# Altium PCB MoonPilot_Logic.PcbDoc
Units mil, origin at the board's own origin, x right, y up, seen from the top; angles counter-clockwise.
Board outline 2362.21 x 3543.31 mil, 4 copper layers (L1, L2, L3, L4), stack 64.6 mil thick; 102 components, 348 nets, 725 pads, 10 vias.
Unrouted connection lines stored in the file: 317.
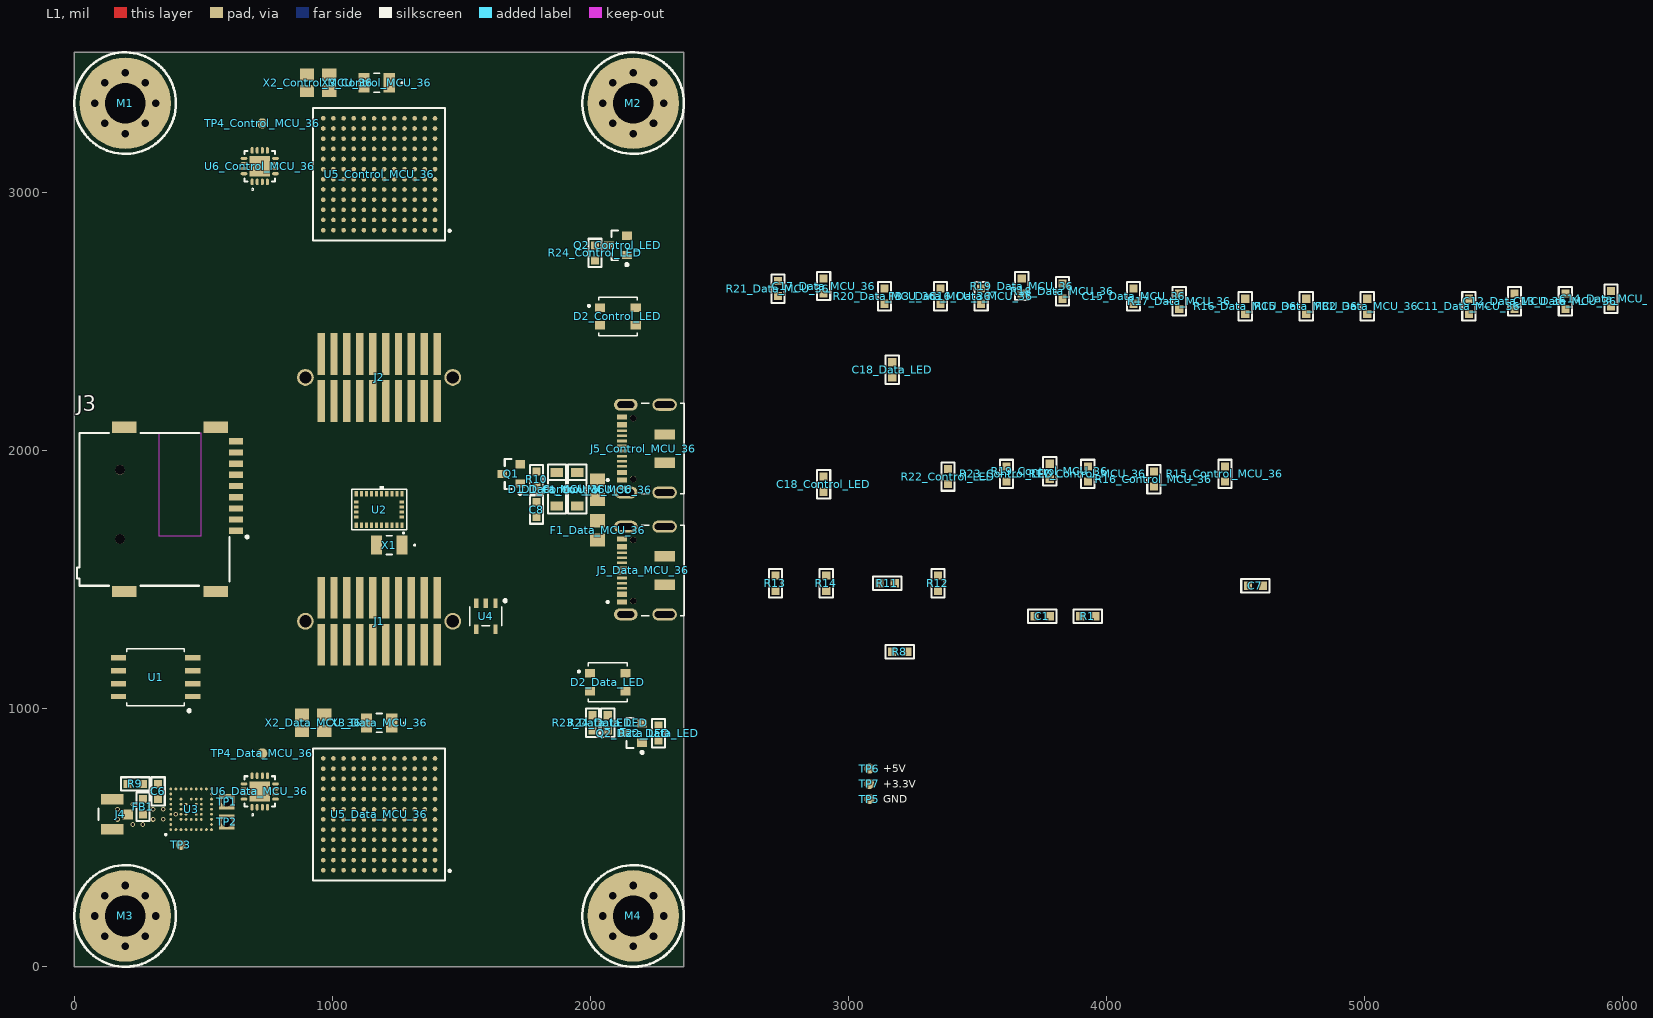
[diagram p0: L1 view]
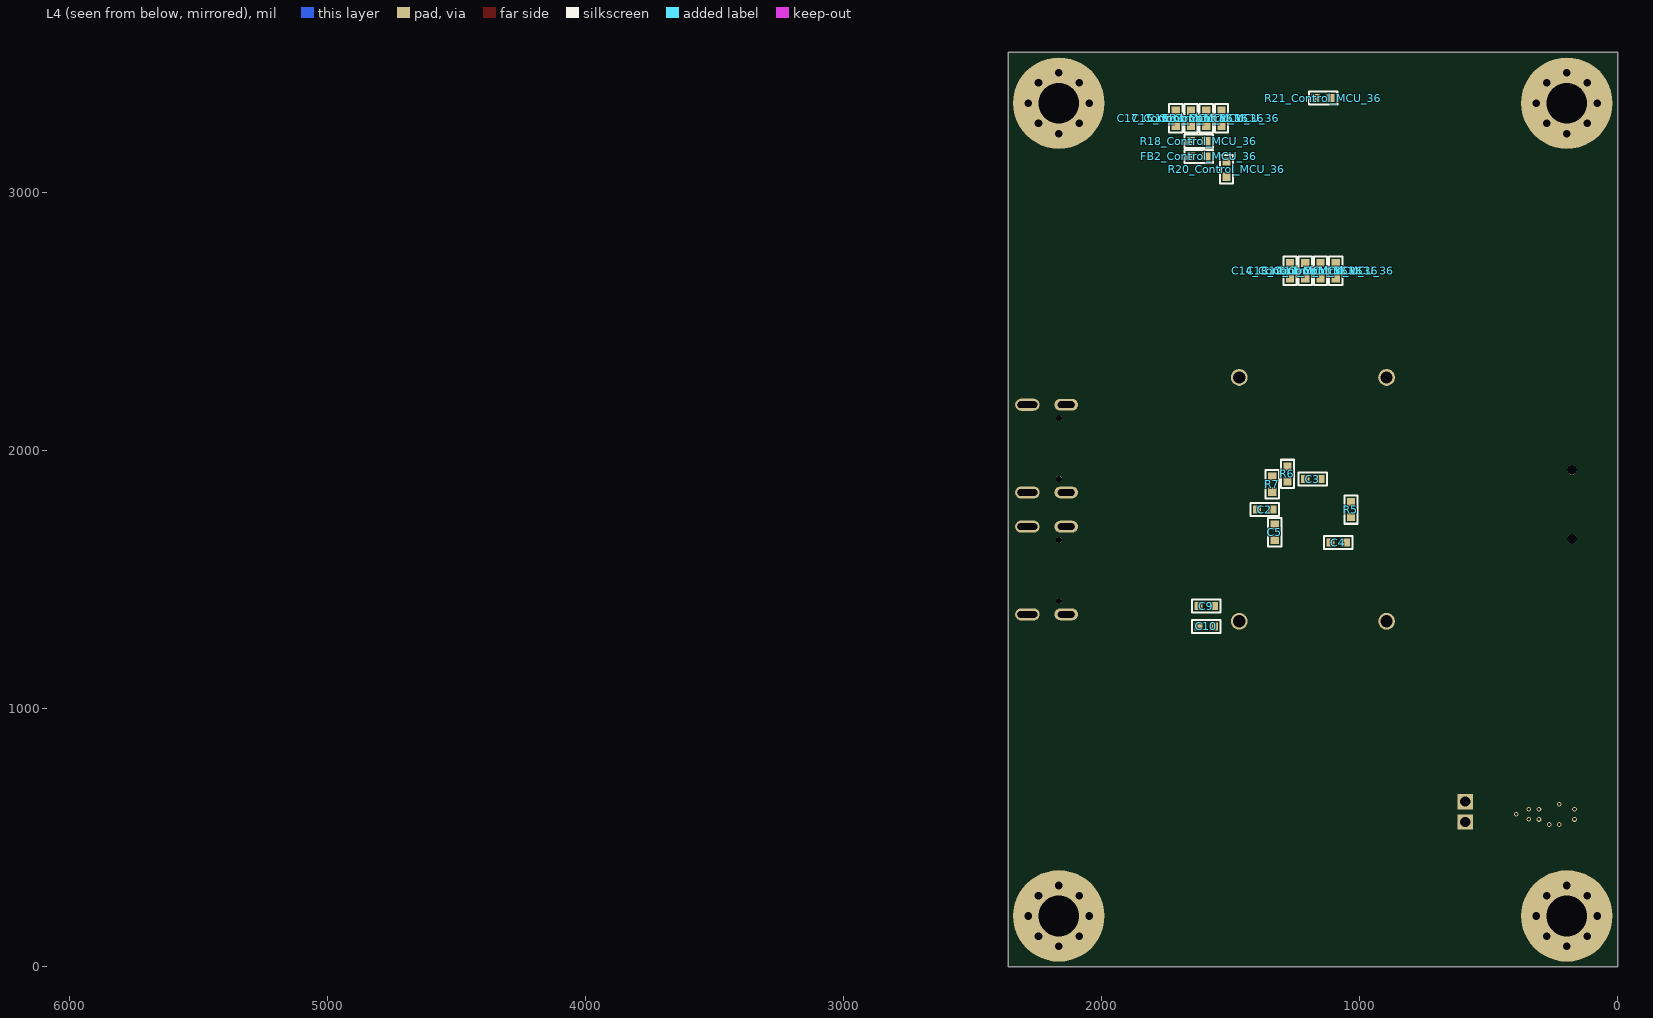
[diagram p1: L4 view, seen from below]
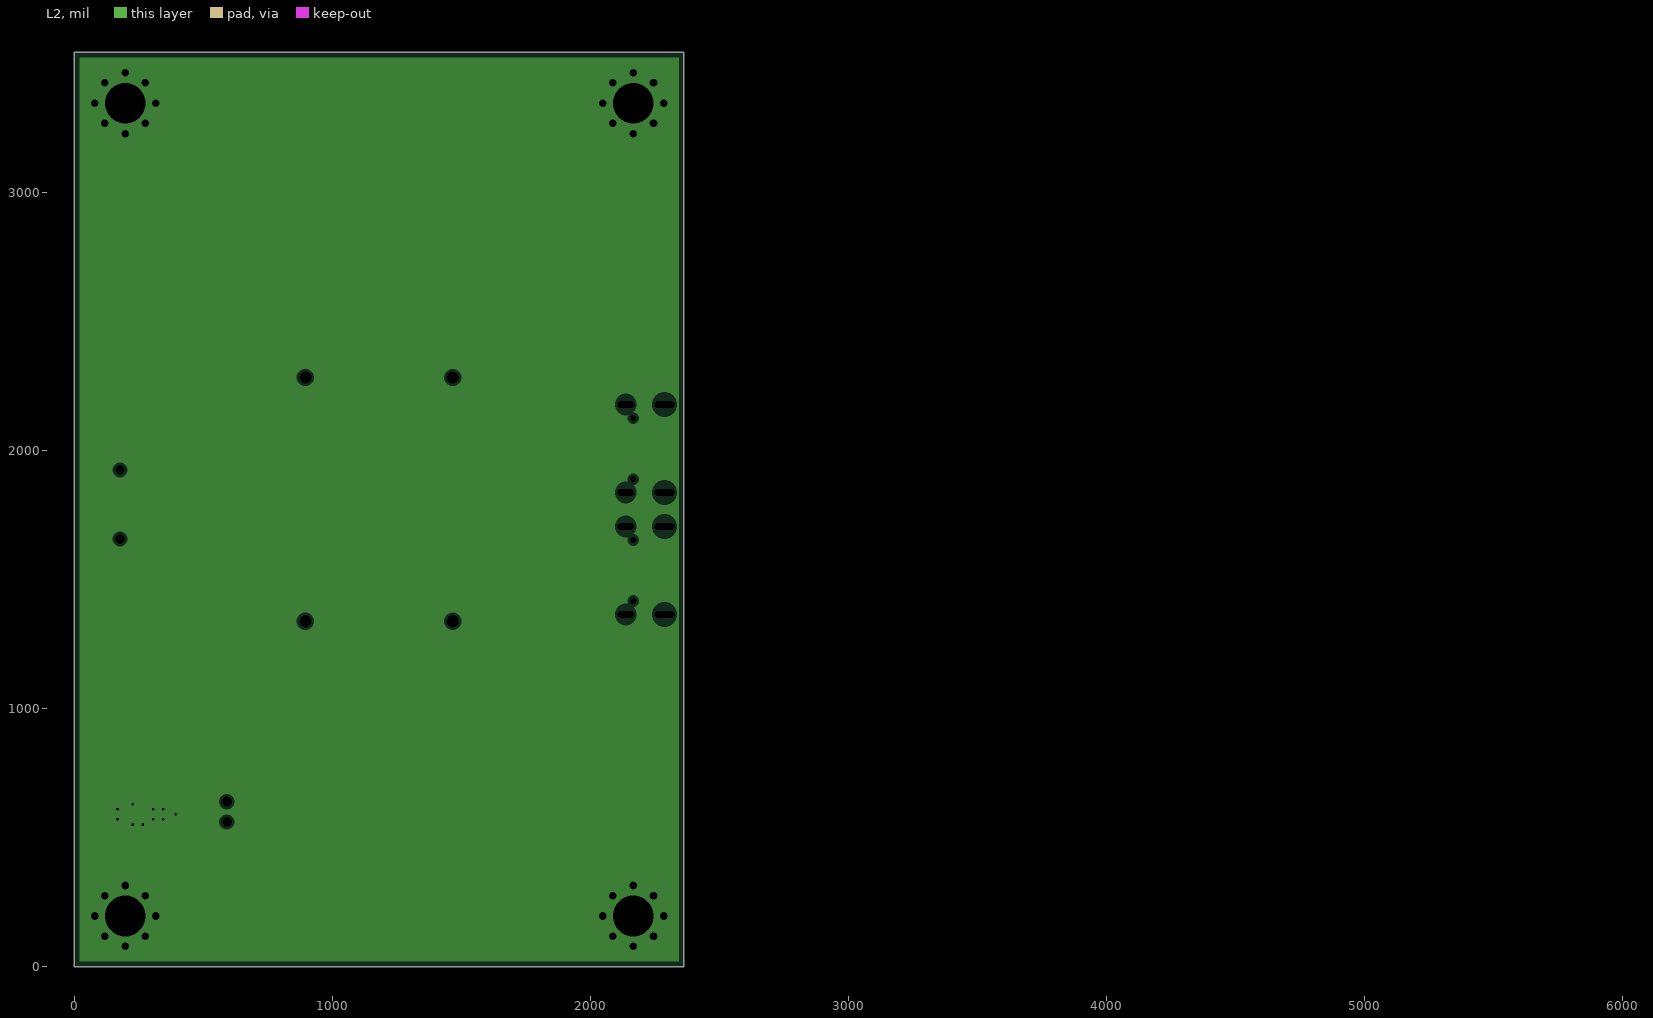
[diagram p2: L2, clearances drawn from the general rule]
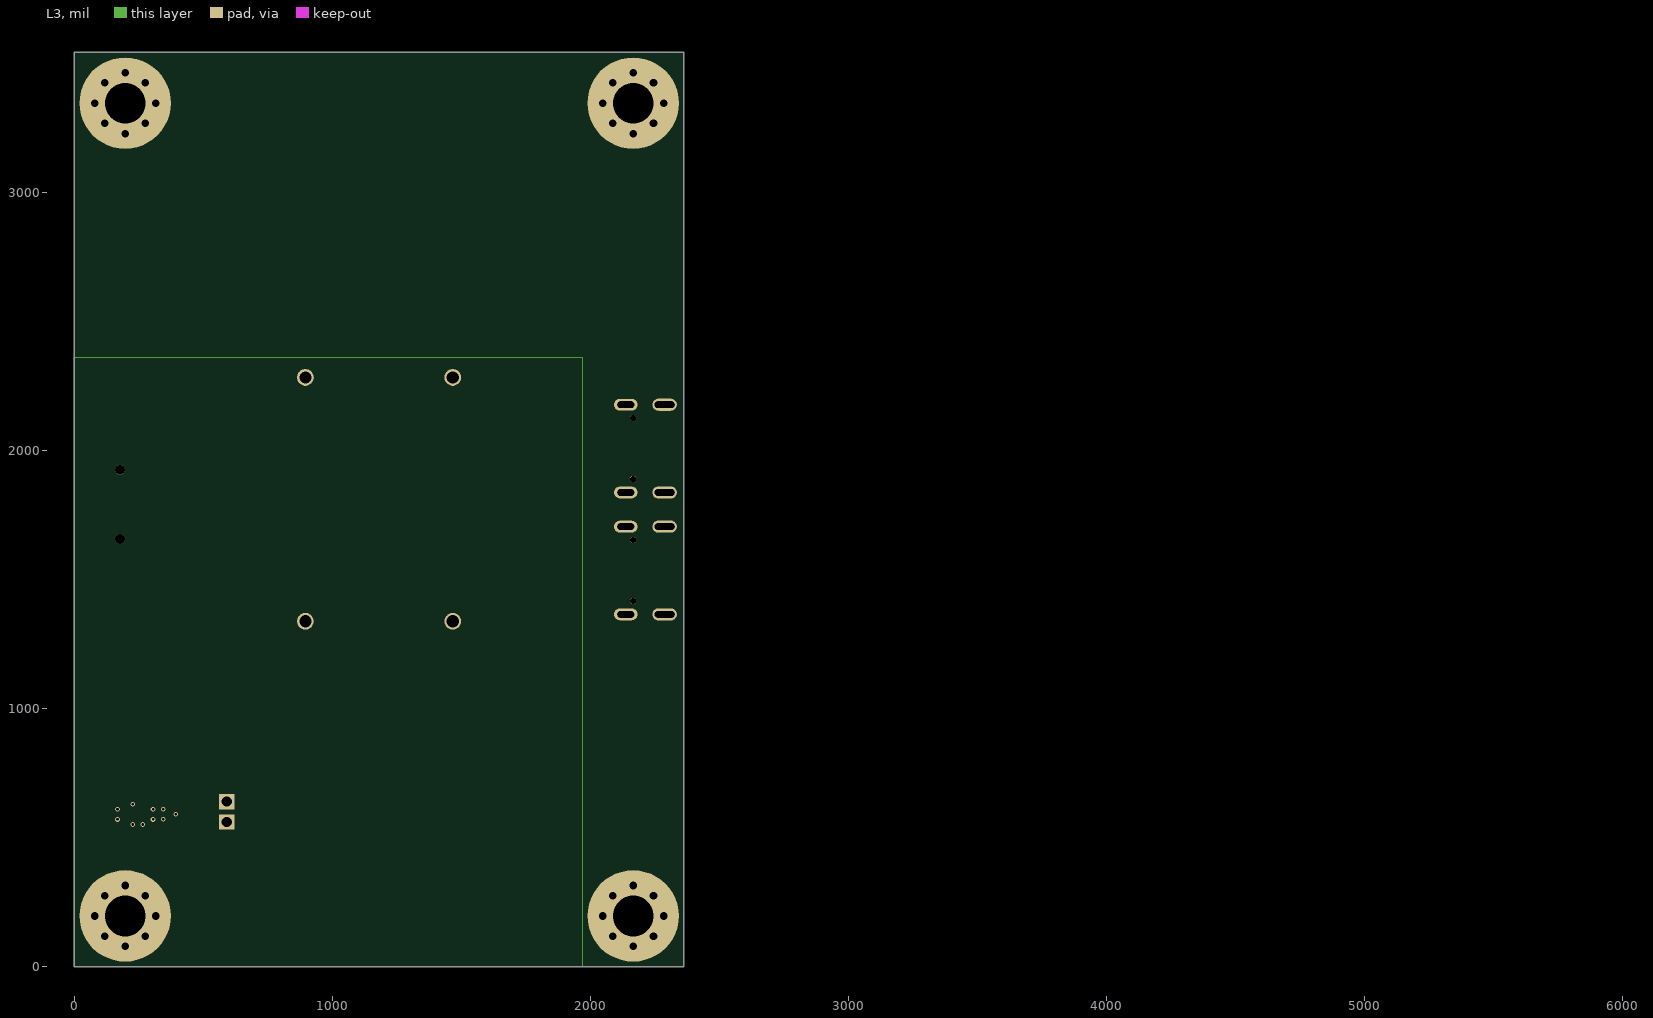
[diagram p3: L3]

## Layer stack, top to bottom
Top Solder: solder mask 0.1, Solder Resist, Dk 1
L1: signal copper 1.4
Prepeg1: dielectric 6.7, FR408, Dk 3.66
L2: plane copper 0.7, net GND
Core: dielectric 47, FR-4, Dk 3.66
L3: signal copper 0.7
Prepeg2: dielectric 6.7, FR408, Dk 3.66
L4: signal copper 1.4
Bottom Solder: solder mask 0.1, Solder Resist, Dk 1

## Board outline
0,0 2362.2,0 2362.2,3543.31 0,3543.31

## Design rules (kind name [scope] priority, off if disabled: settings)
BoardOutlineClearance [All] p1: gap=15 ignorepadtopadclearanceinfootprint=FALSE
Clearance "Clearance Polygons" [InPolygon] p1: gap=10 ignorepadtopadclearanceinfootprint=FALSE except(0: Arc-Hole Track-Hole SMDPad-Hole THPad-Hole Via-Hole Fill-Hole Poly-Hole Region-Hole Text-Hole)
Clearance [All] p2: gap=5 ignorepadtopadclearanceinfootprint=FALSE except(0: Arc-Hole Track-Hole SMDPad-Hole THPad-Hole Via-Hole Fill-Hole Poly-Hole Region-Hole Text-Hole)
ComponentClearance "HM-TRP & UFL" [InComponent('X1') vs InComponent('U1')] p1: gap=0 collisioncheckmode=3 verticalgap=0 showdistances=FALSE
ComponentClearance [All] p2: gap=1 collisioncheckmode=3 verticalgap=1 showdistances=FALSE
DiffPairsRouting [All] p1: maxlimit=393.7 minlimit=5 mostfreqgap=8 toplayer_minwidth=5 toplayer_maxwidth=15 toplayer_prefwidth=8 midlayer2_minwidth=5 midlayer2_maxwidth=15 midlayer2_prefwidth=8 bottomlayer_minwidth=5 bottomlayer_maxwidth=15 bottomlayer_prefwidth=8 maxuncoupledlength=500
HoleSize [All] p1: absolutevalues=TRUE maxlimit=265 minlimit=10 maxpercent=80.000 minpercent=20.000
HoleToHoleClearance [All] p1: gap=10 allowstackedmicrovias=FALSE
MinimumAnnularRing [All] p1: minimumring=4
MinimumSolderMaskSliver [All] p1: minsoldermaskwidth=0
PlaneClearance [All] p1: clearance=10
PlaneConnect [All] p1: planeconnectstyle=Relief reliefexpansion=4 reliefentries=4 reliefconductorwidth=6 reliefairgap=6
PolygonConnect "Via connect style" [isVia] p1: connectstyle=Direct reliefconductorwidth=10 reliefentries=4 polygonreliefangle="90 Angle" airgapwidth=10
PolygonConnect [All] p2: connectstyle=Relief reliefconductorwidth=10 reliefentries=4 polygonreliefangle="90 Angle" airgapwidth=6
RoutingCorners [All] p1: cornerstyle=45-Degree minsetback=49.21 maxsetback=49.21
RoutingVias [All] p1: holewidth=12 width=22 viastyle="Through Hole" minholewidth=10 minwidth=18 maxholewidth=100 maxwidth=114
SilkToSilkClearance [All] p1: silktosilkclearance=0
SilkToSolderMaskClearance [IsPad] p1: minsilkscreentomaskgap=5 clearancetoexposedcopper=TRUE
SolderMaskExpansion [All] p1: expansion=2.5 istentingtop=FALSE
Width +3.3V [InNet('+3.3V')] p1: maxlimit=400 minlimit=5 preferedwidth=15 minimp=50.000000 maximp=50.000000 favimp=50.000000
Width GND [InNet('GND')] p2: maxlimit=30 minlimit=5 preferedwidth=15 minimp=50.000000 maximp=50.000000 favimp=50.000000
Width Power [InNetClass('Power')] p3: maxlimit=40 minlimit=5 preferedwidth=15 minimp=50.000000 maximp=50.000000 favimp=50.000000
Width 3V3 [InNetClass('3V3')] p4: maxlimit=30 minlimit=5 preferedwidth=15 minimp=50.000000 maximp=50.000000 favimp=50.000000
Width [All] p5: maxlimit=400 minlimit=5 preferedwidth=8 minimp=50.000000 maximp=50.000000 favimp=50.000000
20 further rules are at their usual default settings.

## Classes and differential pairs
channel class RGB_LED: Control_LED Data_LED
channel class MCU_3.6: Control_MCU_36 Data_MCU_36
component class Main: C1 C2 C3 C4 C5 C6 C7 C8 C9 C10 C17 C18 C19 FB1 J1 J2 J3 J4 M1 M2 M3 M4 Q1 R1 R5 R6 R7 R8 R9 R10 R11 R12 R13 R14 R19 R21 R22 R23 TP1 TP2 TP3 TP5 TP6 TP7 U1 U2 U3 U4 U7 X1
component class Data_MCU_36: C6_Data_MCU_36 C11_Data_MCU_36 C12_Data_MCU_36 C13_Data_MCU_36 C14_Data_MCU_36 C15_Data_MCU_36 C16_Data_MCU_36 C17_Data_MCU_36 C20_Data_MCU_36 C21_Data_MCU_36 C22_Data_MCU_36 C23_Data_MCU_36 C24_Data_MCU_36 C25_Data_MCU_36 D1_Data_MCU_36 D3_Data_MCU_36 F1_Data_MCU_36 F2_Data_MCU_36 FB2_Data_MCU_36 FB3_Data_MCU_36 J5_Data_MCU_36 J6_Data_MCU_36 R15_Data_MCU_36 R16_Data_MCU_36 R17_Data_MCU_36 R18_Data_MCU_36 R19_Data_MCU_36 R20_Data_MCU_36 R21_Data_MCU_36 R24_Data_MCU_36 R25_Data_MCU_36 R26_Data_MCU_36 R27_Data_MCU_36 R28_Data_MCU_36 R29_Data_MCU_36 TP4_Data_MCU_36 TP5_Data_MCU_36 U3_Data_MCU_36 U5_Data_MCU_36 U6_Data_MCU_36 U8_Data_MCU_36 X2_Data_MCU_36 X3_Data_MCU_36 X4_Data_MCU_36
component class Data_LED: C18_Data_LED C26_Data_LED D2_Data_LED D4_Data_LED Q2_Data_LED Q3_Data_LED R22_Data_LED R23_Data_LED R24_Data_LED R30_Data_LED R31_Data_LED R32_Data_LED
component class Control_MCU_36: C6_Control_MCU_36 C11_Control_MCU_36 C12_Control_MCU_36 C13_Control_MCU_36 C14_Control_MCU_36 C15_Control_MCU_36 C16_Control_MCU_36 C17_Control_MCU_36 C20_Control_MCU_36 C21_Control_MCU_36 C22_Control_MCU_36 C23_Control_MCU_36 C24_Control_MCU_36 C25_Control_MCU_36 D1_Control_MCU_36 D3_Control_MCU_36 F1_Control_MCU_36 F2_Control_MCU_36 FB2_Control_MCU_36 FB3_Control_MCU_36 J5_Control_MCU_36 J6_Control_MCU_36 R15_Control_MCU_36 R16_Control_MCU_36 R17_Control_MCU_36 R18_Control_MCU_36 R19_Control_MCU_36 R20_Control_MCU_36 R21_Control_MCU_36 R24_Control_MCU_36 R25_Control_MCU_36 R26_Control_MCU_36 R27_Control_MCU_36 R28_Control_MCU_36 R29_Control_MCU_36 TP4_Control_MCU_36 TP5_Control_MCU_36 U3_Control_MCU_36 U5_Control_MCU_36 U6_Control_MCU_36 U8_Control_MCU_36 X2_Control_MCU_36 X3_Control_MCU_36 X4_Control_MCU_36
component class Control_LED: C18_Control_LED C26_Control_LED D2_Control_LED D4_Control_LED Q2_Control_LED Q3_Control_LED R22_Control_LED R23_Control_LED R24_Control_LED R30_Control_LED R31_Control_LED R32_Control_LED

## Components (designator, comment, footprint, x,y, rotation, side; value= is the part's Value field where it differs from the comment)
C1 "100nF" 0603_CAP 3750.01,1358.27 r0 top
C2 "100nF" 0603_CAP 1368.11,1771.65 r0 bottom
C3 "100nF" 0603_CAP 1181.1,1889.76 r180 bottom
C4 "12pF" 0603_CAP 1082.68,1643.7 r180 bottom
C5 "12pF" 0603_CAP 1328.74,1683.07 r270 bottom
C6 "40pF" 0603_CAP 324.8,679.13 r90 top
C7 "100nF" 0603_CAP 4576.77,1476.38 r0 top
C8 "1µF" 0603_CAP 1791.34,1771.65 r270 top
C9 "1µF" 0603_CAP 1594.49,1397.64 r180 bottom
C10 "2.2µF" 0603_CAP 1594.49,1318.9 r180 bottom
C11_Control_MCU_36 "2.2µF" 0603_CAP 1092.53,2696.85 r270 bottom (schematic designator C11)
C11_Data_MCU_36 "2.2µF" 0603_CAP 5403.55,2559.06 r90 top (schematic designator C11)
C12_Control_MCU_36 "100nF" 0603_CAP 1151.59,2696.85 r270 bottom (schematic designator C12)
C12_Data_MCU_36 "100nF" 0603_CAP 5580.72,2578.74 r90 top (schematic designator C12)
C13_Control_MCU_36 "100nF" 0603_CAP 1210.64,2696.85 r270 bottom (schematic designator C13)
C13_Data_MCU_36 "100nF" 0603_CAP 5777.57,2578.74 r90 top (schematic designator C13)
C14_Control_MCU_36 "10nF" 0603_CAP 1269.69,2696.85 r270 bottom (schematic designator C14)
C14_Data_MCU_36 "10nF" 0603_CAP 5954.72,2588.58 r90 top (schematic designator C14)
C15_Control_MCU_36 "2.2µF" 0603_CAP 1653.54,3287.4 r90 bottom (schematic designator C15)
C15_Data_MCU_36 "2.2µF" 0603_CAP 4104.34,2598.43 r90 top (schematic designator C15)
C16_Control_MCU_36 "100nF" 0603_CAP 1594.49,3287.4 r90 bottom (schematic designator C16)
C16_Data_MCU_36 "100nF" 0603_CAP 3513.79,2598.43 r90 top (schematic designator C16)
C17_Control_MCU_36 "100nF" 0603_CAP 1712.6,3287.4 r270 bottom (schematic designator C17)
C17_Data_MCU_36 "100nF" 0603_CAP 2903.55,2637.8 r90 top (schematic designator C17)
C18_Control_LED "1µF" 0603_CAP 2903.54,1870.08 r90 top (schematic designator C18)
C18_Data_LED "1µF" 0603_CAP 3169.29,2312.99 r90 top (schematic designator C18)
D1_Control_MCU_36 "PMEG3020EH,115" SOD-123 1948.82,1850.39 r90 top (schematic designator D1)
D1_Data_MCU_36 "PMEG3020EH,115" SOD-123 1870.08,1850.39 r90 top (schematic designator D1)
D2_Control_LED "Neopixel" 2659 2106.3,2519.68 r0 top (schematic designator D2)
D2_Data_LED "Neopixel" 2659 2066.93,1102.36 r0 top (schematic designator D2)
F1_Control_MCU_36 "Polyfuse" 0805 2027.56,1848.43 r270 top (schematic designator F1)
F1_Data_MCU_36 "Polyfuse" 0805 2027.56,1690.94 r90 top (schematic designator F1)
FB1 "FBTH1608HL221-T" 0603_FERRITE 265.75,620.08 r90 top
FB2_Control_MCU_36 "FBTH1608HL221-T" 0603_FERRITE 1624.02,3139.76 r180 bottom (schematic designator FB2)
FB2_Data_MCU_36 "FBTH1608HL221-T" 0603_FERRITE 5009.85,2559.06 r90 top (schematic designator FB2)
FB3_Control_MCU_36 "FBTH1608HL221-T" 0603_FERRITE 1535.43,3287.4 r90 bottom (schematic designator FB3)
FB3_Data_MCU_36 "FBTH1608HL221-T" 0603_FERRITE 3356.3,2598.43 r90 top (schematic designator FB3)
J1 "5-104655-3" 5-104655-3 1181.1,1338.58 r0 top
J2 "5-104655-3" 5-104655-3 1181.1,2283.46 r0 top
J3 "MEM2075-00-140-01-A_revA" MEM2075-00-140-01-A_revA 295.28,1791.34 r270 top
J4 "U.FL-R-SMT-1(10)" U.FL-R-SMT-1(10) 147.64,590.55 r270 top
J5_Control_MCU_36 "DX07S016JA1R1500" JAE_DX07S016JA1R1500 2165.35,2007.87 r90 top (schematic designator J5)
J5_Data_MCU_36 "DX07S016JA1R1500" JAE_DX07S016JA1R1500 2165.35,1535.43 r90 top (schematic designator J5)
M1 "M4 Hole" M4_SCREW 196.85,3346.46 r0 top
M2 "M4 Hole" M4_SCREW 2165.35,3346.46 r0 top
M3 "M4 Hole" M4_SCREW 196.85,196.85 r0 top
M4 "M4 Hole" M4_SCREW 2165.35,196.85 r0 top
Q1 "BCW66GLT1G" INTR-SOT-23-3_V 1692.91,1909.45 r90 top
Q2_Control_LED "BSS138" INTR-SOT-23-3_V 2106.3,2795.28 r90 top (schematic designator Q2)
Q2_Data_LED "BSS138" INTR-SOT-23-3_V 2165.35,905.51 r90 top (schematic designator Q2)
R1 "10K" 0603_RES 3927.17,1358.27 r0 top
R5 "10K" 0603_RES 1033.46,1771.65 r270 bottom
R6 "10K" 0603_RES 1279.53,1909.45 r90 bottom
R7 "10K" 0603_RES 1338.58,1870.08 r270 bottom
R8 "10K" 0603_RES 3198.82,1220.47 r0 top
R9 "10R" 0603_RES 236.22,708.66 r0 top
R10 "1K" 0603_RES 1791.34,1889.76 r270 top
R11 "2K2" 0603_RES 3149.61,1486.22 r0 top
R12 "2K2" 0603_RES 3346.46,1486.22 r90 top
R13 "2K2" 0603_RES 2716.54,1486.22 r90 top
R14 "2K2" 0603_RES 2913.39,1486.22 r90 top
R15_Control_MCU_36 "33R" 0603_RES 4458.67,1909.45 r90 top (schematic designator R15)
R15_Data_MCU_36 "33R" 0603_RES 4773.63,2559.06 r90 top (schematic designator R15)
R16_Control_MCU_36 "5K1" 0603_RES 4183.08,1889.77 r90 top (schematic designator R16)
R16_Data_MCU_36 "5K1" 0603_RES 4537.41,2559.06 r90 top (schematic designator R16)
R17_Control_MCU_36 "33R" 0603_RES 3927.17,1909.45 r90 top (schematic designator R17)
R17_Data_MCU_36 "33R" 0603_RES 4281.5,2578.74 r90 top (schematic designator R17)
R18_Control_MCU_36 "470R" 0603_RES 1624.02,3198.82 r180 bottom (schematic designator R18)
R18_Data_MCU_36 "470R" 0603_RES 3828.75,2618.11 r90 top (schematic designator R18)
R19_Control_MCU_36 "5K1" 0603_RES 3779.53,1919.29 r90 top (schematic designator R19)
R19_Data_MCU_36 "5K1" 0603_RES 3671.27,2637.8 r90 top (schematic designator R19)
R20_Control_MCU_36 "10K" 0603_RES 1515.75,3090.55 r270 bottom (schematic designator R20)
R20_Data_MCU_36 "10K" 0603_RES 3139.77,2598.43 r90 top (schematic designator R20)
R21_Control_MCU_36 "10K" 0603_RES 1141.73,3366.14 r0 bottom (schematic designator R21)
R21_Data_MCU_36 "10K" 0603_RES 2726.38,2627.96 r90 top (schematic designator R21)
R22_Control_LED "10K" 0603_RES 3385.83,1899.61 r90 top (schematic designator R22)
R22_Data_LED "10K" 0603_RES 2263.78,905.51 r90 top (schematic designator R22)
R23_Control_LED "10K" 0603_RES 3612.2,1909.45 r90 top (schematic designator R23)
R23_Data_LED "10K" 0603_RES 2007.87,944.88 r270 top (schematic designator R23)
R24_Control_LED "470R" 0603_RES 2017.72,2765.75 r270 top (schematic designator R24)
R24_Data_LED "470R" 0603_RES 2066.93,944.88 r90 top (schematic designator R24)
TP1 "GPS_TX" Testpoint 590.55,639.76 r180 top
TP2 "GPS_RX" Testpoint 590.55,561.02 r270 top
TP3 "GPS_SAFEBOOT" Testpoint2 413.39,472.44 r270 top
TP4_Control_MCU_36 "PROG" Testpoint2 728.35,3267.72 r270 top (schematic designator TP4)
TP4_Data_MCU_36 "PROG" Testpoint2 728.35,826.77 r270 top (schematic designator TP4)
TP5 "GND" Testpoint2 3080.71,649.61 r90 top
TP6 "5V" Testpoint2 3080.71,767.72 r90 top
TP7 "3.3V" Testpoint2 3080.71,708.66 r90 top
U1 "W25Q128JVSIQ TR" SOIC_208MIL_WIN 314.96,1122.05 r180 top
U2 "BNO055" QFN_BNO055_BOS 1181.1,1771.65 r180 top
U3 "ZOE-M8Q" ZOE-M8Q 452.76,610.24 r90 top
U4 "3.3V linear regulator 700mA" SOT-25_TOR 1594.49,1358.27 r270 top
U5_Control_MCU_36 "MK66FX1M0VMD18" BGA144C100P12X12_1300X1300X170 1181.1,3070.87 r180 top (schematic designator U5)
U5_Data_MCU_36 "MK66FX1M0VMD18" BGA144C100P12X12_1300X1300X170 1181.1,590.55 r180 top (schematic designator U5)
U6_Control_MCU_36 "IC_MKL02Z32_QFN16" QFN50P300X300X65-17N 718.5,3102.36 r90 top (schematic designator U6)
U6_Data_MCU_36 "IC_MKL02Z32_QFN16" QFN50P300X300X65-17N 718.5,679.13 r90 top (schematic designator U6)
X1 "ABS07-166-32.768KHZ-T" XTAL_ABS07-166 1220.47,1633.86 r180 top
X2_Control_MCU_36 "NX3225SA-16.000000MHZ-B3" XTAL_NX3225SA 944.88,3425.2 r180 top (schematic designator X2)
X2_Data_MCU_36 "NX3225SA-16.000000MHZ-B3" XTAL_NX3225SA 925.2,944.88 r180 top (schematic designator X2)
X3_Control_MCU_36 "ABS07-166-32.768KHZ-T" XTAL_ABS07-166 1171.26,3425.2 r180 top (schematic designator X3)
X3_Data_MCU_36 "ABS07-166-32.768KHZ-T" XTAL_ABS07-166 1181.1,944.88 r180 top (schematic designator X3)

## Footprints (in the part's own frame and the unit in brackets; to place one, negate y for a bottom-side part, rotate by r counter-clockwise, add the part's x,y. Pads: shape width x height; smd on the part's side, far side on the other; paste and mask are expansions set on the pad)
5-104655-3 [mm]
  rect 0.73x4.11 smd: 1(-5.715,2.31) 2(-4.445,2.31) 3(-3.175,2.31) 4(-1.905,2.31) 5(-0.635,2.31) 6(0.635,2.31) 7(1.905,2.31) 8(3.175,2.31) 9(4.445,2.31) 10(5.715,2.31) 11(-5.715,-2.31) 12(-4.445,-2.31) 13(-3.175,-2.31) 14(-1.905,-2.31) 15(-0.635,-2.31) 16(0.635,-2.31) 17(1.905,-2.31) 18(3.175,-2.31) 19(4.445,-2.31) 20(5.715,-2.31)
  round 1.65 hole 1.2: 21(-7.255,0) 21(7.255,0)
  body extent -7.9,-3.62 7.9,3.62, height 5.8
0603_CAP [mm] "0603 capacitor"
  rect 0.8x0.8 smd: 1(-0.75,0) 2(0.75,0)
  silkscreen extent -1.4,-0.65 1.4,0.65, body extent -0.8,-0.4 0.8,0.4, height 0.7
0603_FERRITE [mm] "0603 ferrite bead"
  rect 0.8x0.8 smd: 1(-0.75,0) 2(0.75,0)
  silkscreen extent -1.4,-0.65 1.4,0.65, body extent -0.8,-0.4 0.8,0.4, height 0.4
0603_RES [mm] "0603 resistor"
  rect 0.8x0.8 smd: 1(-0.75,0) 2(0.75,0)
  silkscreen extent -1.4,-0.65 1.4,0.65, body extent -0.8,-0.4 0.8,0.4, height 0.4
0805 [mm] "Chip Resistor; Body 2 x 1.2 mm (LxW typ)"
  rect 1.3x1.5 smd: 1(-0.95,0) 2(0.95,0)
  body extent -1,-0.6 1,0.6, height 0.7
2659 [mm]
  rect 1x0.85 smd: 1(-1.75,0.875) 2(-1.75,-0.875) 3(1.75,-0.875) 4(1.75,0.875)
  silkscreen extent -2.95,-1.9 1.9,1.9, body extent -1.85,-1.75 1.85,1.75, height 0.95
BGA144C100P12X12_1300X1300X170 [mm]
  round 0.45 smd: A1(-5.5,5.5) A2(-4.5,5.5) A3(-3.5,5.5) A4(-2.5,5.5) A5(-1.5,5.5) A6(-0.5,5.5) A7(0.5,5.5) A8(1.5,5.5) A9(2.5,5.5) A10(3.5,5.5) A11(4.5,5.5) A12(5.5,5.5) B1(-5.5,4.5) B2(-4.5,4.5) B3(-3.5,4.5) B4(-2.5,4.5) B5(-1.5,4.5) B6(-0.5,4.5) B7(0.5,4.5) B8(1.5,4.5) B9(2.5,4.5) B10(3.5,4.5) B11(4.5,4.5) B12(5.5,4.5) C1(-5.5,3.5) C2(-4.5,3.5) C3(-3.5,3.5) C4(-2.5,3.5) C5(-1.5,3.5) C6(-0.5,3.5) C7(0.5,3.5) C8(1.5,3.5) C9(2.5,3.5) C10(3.5,3.5) C11(4.5,3.5) C12(5.5,3.5) D1(-5.5,2.5) D2(-4.5,2.5) D3(-3.5,2.5) D4(-2.5,2.5) D5(-1.5,2.5) D6(-0.5,2.5) D7(0.5,2.5) D8(1.5,2.5) D9(2.5,2.5) D10(3.5,2.5) D11(4.5,2.5) D12(5.5,2.5) E1(-5.5,1.5) E2(-4.5,1.5) E3(-3.5,1.5) E4(-2.5,1.5) E5(-1.5,1.5) E6(-0.5,1.5) E7(0.5,1.5) E8(1.5,1.5) E9(2.5,1.5) E10(3.5,1.5) E11(4.5,1.5) E12(5.5,1.5) F1(-5.5,0.5) F2(-4.5,0.5) F3(-3.5,0.5) F4(-2.5,0.5) F5(-1.5,0.5) F6(-0.5,0.5) F7(0.5,0.5) F8(1.5,0.5) F9(2.5,0.5) F10(3.5,0.5) F11(4.5,0.5) F12(5.5,0.5) G1(-5.5,-0.5) G2(-4.5,-0.5) G3(-3.5,-0.5) G4(-2.5,-0.5) G5(-1.5,-0.5) G6(-0.5,-0.5) G7(0.5,-0.5) G8(1.5,-0.5) G9(2.5,-0.5) G10(3.5,-0.5) G11(4.5,-0.5) G12(5.5,-0.5) H1(-5.5,-1.5) H2(-4.5,-1.5) H3(-3.5,-1.5) H4(-2.5,-1.5) H5(-1.5,-1.5) H6(-0.5,-1.5) H7(0.5,-1.5) H8(1.5,-1.5) H9(2.5,-1.5) H10(3.5,-1.5) H11(4.5,-1.5) H12(5.5,-1.5) J1(-5.5,-2.5) J2(-4.5,-2.5) J3(-3.5,-2.5) J4(-2.5,-2.5) J5(-1.5,-2.5) J6(-0.5,-2.5) J7(0.5,-2.5) J8(1.5,-2.5) J9(2.5,-2.5) J10(3.5,-2.5) J11(4.5,-2.5) J12(5.5,-2.5) K1(-5.5,-3.5) K2(-4.5,-3.5) K3(-3.5,-3.5) K4(-2.5,-3.5) K5(-1.5,-3.5) K6(-0.5,-3.5) K7(0.5,-3.5) K8(1.5,-3.5) K9(2.5,-3.5) K10(3.5,-3.5) K11(4.5,-3.5) K12(5.5,-3.5) L1(-5.5,-4.5) L2(-4.5,-4.5) L3(-3.5,-4.5) L4(-2.5,-4.5) L5(-1.5,-4.5) L6(-0.5,-4.5) L7(0.5,-4.5) L8(1.5,-4.5) L9(2.5,-4.5) L10(3.5,-4.5) L11(4.5,-4.5) L12(5.5,-4.5) M1(-5.5,-5.5) M2(-4.5,-5.5) M3(-3.5,-5.5) M4(-2.5,-5.5) M5(-1.5,-5.5) M6(-0.5,-5.5) M7(0.5,-5.5) M8(1.5,-5.5) M9(2.5,-5.5) M10(3.5,-5.5) M11(4.5,-5.5) M12(5.5,-5.5)
  silkscreen extent -7.05,-6.5 6.5,6.5, body extent -6.5,-6.5 6.5,6.5, height 1.7
INTR-SOT-23-3_V [mm] "SOT23, 3-Leads, Body 2.92x1.3mm, Pitch 1.9mm"
  rect 0.802x0.972 smd: 1(-0.95,-0.885) 2(0.95,-0.885) 3(0,0.885)
  silkscreen extent -2.03,-1.01 1.46,0.64, body extent -1.46,-0.65 1.46,0.65, height 1.12
JAE_DX07S016JA1R1500 [mm]
  rect 0.52x1 smd: 1(-3.1,1.1) 2(-2.35,1.1) 11(2.35,1.1) 12(3.1,1.1)
  rect 0.27x1 smd: 3(-1.75,1.1) 4(-1.25,1.1) 5(-0.75,1.1) 6(-0.25,1.1) 7(0.25,1.1) 8(0.75,1.1) 9(1.25,1.1) 10(1.75,1.1)
  rect 1x2 smd: S1(-1.4,-3.1) S2(1.4,-3.1)
  oval 1.158x2.316 hole 0.65 slot 1.65 at 90 deg: S3(-4.32,0.725) S4(4.32,0.725)
  oval 1.2x2.4 hole 0.65 slot 1.95 at 90 deg: S5(-4.32,-3.1) S6(4.32,-3.1)
  round 0.63 hole 0.63 unplated: ""(-3,0) ""(3,0)
  round 0.6 hole 0.6 unplated: ""(3,0)
  silkscreen extent -4.47,-5.05 4.47,2.6, body extent -4.47,-5.48 4.47,1.42, height 3.31
M4_SCREW [mm]
  round 2 hole 0.75: 1(-3,0) 1(-2,-2) 1(-2,2) 1(0,-3) 1(0,3) 1(2,-2) 1(2,2) 1(3,0)
  round 9 hole 4: 1(0,0)
  silkscreen extent -5,-5 5,5
MEM2075-00-140-01-A_revA [mm] "Micro SD Memory Card Connector, 1.4mm Profile SMT , Push-Push , with Normally open Switch"
  round 0.95 hole 0.95 unplated: 10(-3.4,-3) 11(3.4,-3)
  rect 0.62x1.4 smd: P1(2.59,8.42) P2(1.49,8.42) P3(0.39,8.42) P4(-0.71,8.42) P5(-1.81,8.42) P6(-2.91,8.42) P7(-4.01,8.42) P8(-5.11,8.42) P9(-6.21,8.42)
  rect 1.1x2.4 smd: SH1(-7.59,6.42) SH2(8.56,6.42) SH3(-7.59,-2.58) SH4(8.56,-2.58)
  L1 keep-out region: -7.05,0.87 -7.05,4.92 3.15,4.92 3.15,0.87
  silkscreen extent -7.05,-7.23 8,9.62, body extent -7.74,-7.23 8.7,8.62, height 1.4
QFN50P300X300X65-17N [mm]
  oval 0.65x0.3 smd: 1(-1.55,0.75) 2(-1.55,0.25) 3(-1.55,-0.25) 4(-1.55,-0.75) 9(1.55,-0.75) 10(1.55,-0.25) 11(1.55,0.25) 12(1.55,0.75)
  oval 0.3x0.65 smd: 5(-0.75,-1.55) 6(-0.25,-1.55) 7(0.25,-1.55) 8(0.75,-1.55) 13(0.75,1.55) 14(0.25,1.55) 15(-0.25,1.55) 16(-0.75,1.55)
  rect 2x2 smd: 17(0,0)
  silkscreen extent -2.4,-1.5 1.5,1.5
QFN_BNO055_BOS [mil]
  rect 12x21 smd paste+0 mask+0: 1(-88.58,60.5) 6(-88.58,-60.5) 7(-68.9,-60.5) 8(-49.21,-60.5) 9(-29.53,-60.5) 10(-9.84,-60.5) 11(9.84,-60.5) 12(29.53,-60.5) 13(49.21,-60.5) 14(68.9,-60.5) 15(88.58,-60.5) 20(88.58,60.5) 21(68.9,60.5) 22(49.21,60.5) 23(29.53,60.5) 24(9.84,60.5) 25(-9.84,60.5) 26(-29.53,60.5) 27(-49.21,60.5) 28(-68.9,60.5)
  rect 17x12 smd: 2(-88,29.53) 3(-88,9.84) 4(-88,-9.84) 5(-88,-29.53) 16(88,-29.53) 17(88,-9.84) 18(88,9.84) 19(88,29.53)
  silkscreen extent -106,-91 106,92, body extent 0,0 10,10, height 10
SOD-123 [mm]
  rect 0.92x1.22 smd: 1(-1.651,0) 2(1.651,0)
  silkscreen extent -2.41,-0.89 2.41,0.89, body extent -1.93,-0.89 1.93,0.81, height 1.42
SOIC_208MIL_WIN [mil]
  rect 59.56x20.97 smd paste+0 mask+0: 1(-143.5,75) 2(-143.5,25) 3(-143.5,-25) 4(-143.5,-75) 5(143.5,-75) 6(143.5,-25) 7(143.5,25) 8(143.5,75)
  silkscreen extent -135,-111 111,135, body extent -159,-106 159,106, height 85
SOT-25_TOR [mil]
  rect 36.28x17 smd paste+0 mask+0: 1(-50.64,37.4) 2(-50.64,0) 3(-50.64,-37.4) 4(50.64,-37.4) 5(50.64,37.4)
  silkscreen extent -65,-62 38,80, body extent -55,-57 55,57, height 51
Testpoint [mm] "Testpoint"
  rect 1.5x1.5 hole 1 paste+0: 1(0,0)
Testpoint2 [mm] "Testpoint2"
  round 1 smd paste-1.5: 1(0,0)
U.FL-R-SMT-1(10) [mm] "Digikey part no. H11891CT-ND"
  rect 1x1.05 smd paste-1000 mask+0: 1(0,1.525)
  rect 1.05x2.2 smd paste-1000 mask+0: 2(-1.475,0) 3(1.475,0)
  silkscreen extent -0.58,-1.38 0.58,-1.38, body extent -1.5,-1.55 1.5,1.55, height 1.45
XTAL_ABS07-166 [mm] "XTAL_ABS07-166-32.768KHZ-T_ABR"
  rect 1.1x1.9 smd paste+0 mask+0: 1(-1.25,0) 2(1.25,0)
  silkscreen extent -2.58,-0.93 0.3,0.93, body extent -1.81,-1.09 1.82,1.09, height 0.89
XTAL_NX3225SA [mm] "NX3225SA-16.000000MHZ-B3"
  rect 1.4x1.2 smd: 1(-1.1,-0.8) 2(1.1,-0.8) 3(1.1,0.8) 4(-1.1,0.8)
  body extent -1.6,-1.25 1.6,1.25, height 0.7
ZOE-M8Q [mm]
  round 0.27 smd mask+0.05: A1(-2,2) A2(-1.5,2) A3(-1,2) A4(-0.5,2) A5(0,2) A6(0.5,2) A7(1,2) A8(1.5,2) A9(2,2) B1(-2,1.5) B9(2,1.5) C1(-2,1) C3(-1,1) C4(-0.5,1) C5(0,1) C6(0.5,1) C7(1,1) C9(2,1) D1(-2,0.5) D3(-1,0.5) D4(-0.5,0.5) D6(0.5,0.5) D9(2,0.5) E1(-2,0) E3(-1,0) E7(1,0) E9(2,0) F1(-2,-0.5) F3(-1,-0.5) F4(-0.5,-0.5) F6(0.5,-0.5) F7(1,-0.5) F9(2,-0.5) G1(-2,-1) G3(-1,-1) G4(-0.5,-1) G5(0,-1) G6(0.5,-1) G7(1,-1) G9(2,-1) H1(-2,-1.5) H9(2,-1.5) J1(-2,-2) J2(-1.5,-2) J3(-1,-2) J4(-0.5,-2) J5(0,-2) J6(0.5,-2) J7(1,-2) J8(1.5,-2) J9(2,-2)
  silkscreen extent -2.54,2.46 -2.46,2.54, body extent -2.25,-2.25 2.25,2.25, height 1

## Part data
C1 C2 C3 C4 C5 C6 C7 C8 C9 C10 C11_Control_MCU_36 C11_Data_MCU_36 C12_Control_MCU_36 C12_Data_MCU_36 C13_Control_MCU_36 C13_Data_MCU_36 C14_Control_MCU_36 C14_Data_MCU_36 C15_Control_MCU_36 C15_Data_MCU_36 C16_Control_MCU_36 C16_Data_MCU_36 C17_Control_MCU_36 C17_Data_MCU_36 C18_Control_LED C18_Data_LED: library part Capacitor
D1_Control_MCU_36 D1_Data_MCU_36: library part "Schottky diode"
D2_Control_LED D2_Data_LED: "Adafruit Neopixel SMD 3535 / Adafruit part no. 2659 / Digikey part no. 1528-1542-ND", Package="TQFP-32 Adafruit Industries", Digi-Key_Part_Number=2183-2659-ND, Digi-Key_Purchase_URL=https://www.digikey.com/product-detail/en/pololu-corporation/2659/2183-2659-ND/10451102?utm_source=snapeda&utm_medium=aggregator&utm_campaign=symbol, MF="Adafruit Industries", MP=2659, SnapEDA_Link=https://www.snapeda.com/parts/2659/Adafruit%20Industries%20LLC/view-part/548522/?ref=snap
F1_Control_MCU_36 F1_Data_MCU_36: library part Fuse
FB1 FB2_Control_MCU_36 FB2_Data_MCU_36 FB3_Control_MCU_36 FB3_Data_MCU_36: library part "Ferrite Bead", "Digikey part no. / 587-FBTH1608HL221-TCT-ND"
J1 J2: library part "20 pin vertical board to board male", "Digikey part no. A31866-ND / 1.27mm male board to board connector, 2 row"
J3: library part "MicroSD Card holder", "Push-Push style MicroSD Card holder / Digikey part no. 2073-MEM2075-00-140-01-ACT-ND", Manufacturer=GCT, Package=GCT_MEM2075-00-140-01-A_revA, PartRev=A, STANDARD="Manufacturer Recommendations"
J4: library part "U.FL SMD", "Digikey part no. H11891CT-ND"
J5_Control_MCU_36 J5_Data_MCU_36: "USB 2.0 Type C Receptacle Dip Type, PCB Top Mount (Digikey part no. 670-DX07S016JA1R1500CT-ND)", Package=None, Availability=Unavailable, DigiKey-Purchase-URL=https://snapeda.com/shop?store=DigiKey&id=4551013, MF="JAE Electronics", MP=DX07S016JA1R1500, Price=None, SnapEDA_Link=https://www.snapeda.com/parts/DX07S016JA1R1500/JAE%20Electronics/view-part/4551013/?ref=snap
Q1: library part "Transistor NPN"
Q2_Control_LED Q2_Data_LED: library part IRLML2502TRPBF, "N-Channel HEXFET(R) Power MOSFET, 20 V VDS, +/- 12 V VGS, 4.2 A, 3-Pin SOT23, RoHS, Tape and Reel", Drain-Source On Resistance-Max=0.045O, Drain-to-Source Voltage [Vdss]=20V, Manufacturer="International Rectifier", Package Description="3-Pin Small Outline Transistor, Body 2.92 x 1.3 mm, Pitch 0.95 mm", Package Reference=SOT-23-3, Rated Power Dissipation=1.25W, Channel Type=N-Channel, Datasheet URL=https://datasheet.ciiva.com/6383/irlml2502pbf-6383216.pdf, Datasheet Version=Apr-14, Manufacturer URL=http://internationalrectifier.com/, Qg Gate Charge=8nC
R1 R5 R6 R7 R8 R9 R10 R11 R12 R13 R14 R15_Control_MCU_36 R15_Data_MCU_36 R16_Control_MCU_36 R16_Data_MCU_36 R17_Control_MCU_36 R17_Data_MCU_36 R18_Control_MCU_36 R18_Data_MCU_36 R19_Control_MCU_36 R19_Data_MCU_36 R20_Control_MCU_36 R20_Data_MCU_36 R21_Control_MCU_36 R21_Data_MCU_36 R22_Control_LED R22_Data_LED R23_Control_LED R23_Data_LED R24_Control_LED R24_Data_LED: library part Resistor
TP1 TP2 TP3 TP4_Control_MCU_36 TP4_Data_MCU_36 TP5 TP6 TP7: library part Testpoint
U1 U2: "No Description Available", Copyright="Copyright (C) 2018 Accelerated Designs. All rights reserved", RefDes=RefDes, Type=DEV
  U1: Built_By=EMA_Cory, Datasheet=https://www.winbond.com/resource-files/w25q128jv%20revf%2003272018%20plus.pdf, Manufacturer_Part_Number="W25Q128JVSIQ TR", SourceLibrary=Winbond_2020-02-06, Vendor=Winbond
  U2: Built_By=EMA_Matt, Datasheet=https://www.bosch-sensortec.com/media/boschsensortec/downloads/datasheets/bst-bno055-ds000.pdf, Manufacturer_Part_Number=BNO055, SourceLibrary=Bosch_2019-11-06, Vendor=Bosch
U3: "u-blox ZOE GNSS module", Manufacturer=u-blox, Part Description="u-blox ZOE-M8Q GNSS module"
U4: library part XC6222B331MR-G, "Digikey part no. 893-1143-1-ND", Built_By=EMA_UL_Team, Copyright="Copyright (C) 2018 Accelerated Designs. All rights reserved", Manufacturer_Part_Number=XC6222B331MR-G, RefDes=RefDes, SourceLibrary=Torex_2016-07-11_1, Type=DEV, Vendor="Torex Semiconductor"
U5_Control_MCU_36 U5_Data_MCU_36: "32-bit ARM Cortex-M4F Microcontroller 180 MHz 144-MAPBGA / DigiKey part no. 568-13335-ND", Package="MAPBGA-144 NXP Semiconductors", Availability=Unavailable, MF="NXP USA", MP=MK66FX1M0VMD18, Price=None, SnapEDA_Link=https://www.snapeda.com/parts/MK66FX1M0VMD18/NXP%20USA%20Inc./view-part/567598/?ref=snap
U6_Control_MCU_36 U6_Data_MCU_36: "Teensy bootloader", Package="QFN-16 NXP Semiconductors", Availability=Unavailable, MF="NXP USA", MP=MKL02Z32VFG4, Price=None, SnapEDA_Link=https://www.snapeda.com/parts/MKL02Z32VFG4/NXP%20USA%20Inc./view-part/492537/?ref=snap
X1 X3_Control_MCU_36 X3_Data_MCU_36: library part "XTAL_32.768 kHz", "Digikey part no. 535-14514-1-ND / Requires 12pF load capacitors"
X2_Control_MCU_36 X2_Data_MCU_36: library part "XTAL_16 MHz", "Digikey part no. 644-1099-1-ND"

## Via types
v1: diameter 18, hole 10, L1 to L4, tented both sides, 10 vias

## Nets (pads, with @x,y where several pads share a name; then routed paths per layer and width w, separated by ;. In a path a pad name is that pad's centre, name@x,y a point inside that pad or via, vN(x,y) a via of type N, cw(c..) or ccw(c..) an arc to the next point about the centre after c; other vN are vias at no path point)
+3.3V: C1.1 C2.1 C7.1 C10.1 C11_Control_MCU_36.1 C11_Data_MCU_36.1 C12_Control_MCU_36.1 C12_Data_MCU_36.1 C13_Control_MCU_36.1 C13_Data_MCU_36.1 C14_Control_MCU_36.1 C14_Data_MCU_36.1 FB2_Control_MCU_36.2 FB2_Data_MCU_36.2 J3.P4 Q2_Control_LED.1 Q2_Data_LED.1 R1.2 R8.1 R9.1 R11.1 R12.1 R13.1 R14.1 R22_Control_LED.1 R22_Data_LED.1 TP7.1 U1.3 U1.7 U1.8 U2.3 U2.4 U2.28 U3.G1 U3.H1 U3.H9 U3.J1 U3.J2 U4.5 U5_Control_MCU_36.E5 U5_Control_MCU_36.E6 U5_Control_MCU_36.E7 U5_Control_MCU_36.E8 U5_Control_MCU_36.F5 U5_Control_MCU_36.F8 U5_Control_MCU_36.L6 U5_Data_MCU_36.E5 U5_Data_MCU_36.E6 U5_Data_MCU_36.E7 U5_Data_MCU_36.E8 U5_Data_MCU_36.F5 U5_Data_MCU_36.F8 U5_Data_MCU_36.L6 U6_Control_MCU_36.1 U6_Data_MCU_36.1
+5V: C9.1 C18_Control_LED.1 C18_Data_LED.1 D2_Control_LED.2 D2_Data_LED.2 J1.1 J1.2 J1.3 J1.4 Q1.2 R23_Control_LED.1 R23_Data_LED.1 TP6.1 U4.1 U4.3
+5V_USB: D1_Control_MCU_36.2 D1_Data_MCU_36.2 Q1.3 R10.1
BACKUP_SENSE: J1.16 U5_Data_MCU_36.L4
BAT_SENSE: J1.5 U5_Data_MCU_36.L3
D+_Control_MCU_36: R17_Control_MCU_36.1 U5_Control_MCU_36.H1
D+_Data_MCU_36: R17_Data_MCU_36.1 U5_Data_MCU_36.H1
D-_Control_MCU_36: R15_Control_MCU_36.1 U5_Control_MCU_36.H2
D-_Data_MCU_36: R15_Data_MCU_36.1 U5_Data_MCU_36.H2
GND: C1.2 C2.2 C3.1 C4.1 C5.1 C6.2 C7.2 C8.2 C9.2 C10.2 C11_Control_MCU_36.2 C11_Data_MCU_36.2 C12_Control_MCU_36.2 C12_Data_MCU_36.2 C13_Control_MCU_36.2 C13_Data_MCU_36.2 C14_Control_MCU_36.2 C14_Data_MCU_36.2 C18_Control_LED.2 C18_Data_LED.2 D2_Control_LED.4 D2_Data_LED.4 FB3_Control_MCU_36.1 FB3_Data_MCU_36.1 J1.11 J1.12 J1.13 J1.14 J1.15 J3.P6 J4.2 J5_Control_MCU_36.1 J5_Control_MCU_36.12 J5_Data_MCU_36.1 J5_Data_MCU_36.12 M1.1 M2.1 M3.1 M4.1 R5.2 R6.2 R7.1 R16_Control_MCU_36.2 R16_Data_MCU_36.2 R19_Control_MCU_36.2 R19_Data_MCU_36.2 R20_Control_MCU_36.1 R20_Data_MCU_36.1 R21_Control_MCU_36.1 R21_Data_MCU_36.1 TP5.1 U1.4 U2.2 U2.18 U2.25 U3.A1 U3.A3 U3.A5 U3.A7 U3.A8 U3.A9 U3.B9 U3.C7 U3.C9 U3.D6 U3.D9 U3.E7 U3.F7 U3.G3 U3.G6 U3.G7 U3.J3 U3.J9 U4.2 U5_Control_MCU_36.F6 U5_Control_MCU_36.F7 U5_Control_MCU_36.G7 U5_Control_MCU_36.G8 U5_Control_MCU_36.H3 U5_Control_MCU_36.H7 U5_Control_MCU_36.H8 U5_Control_MCU_36.K2 U5_Control_MCU_36.M10 U5_Data_MCU_36.F6 U5_Data_MCU_36.F7 U5_Data_MCU_36.G7 U5_Data_MCU_36.G8 U5_Data_MCU_36.H3 U5_Data_MCU_36.H7 U5_Data_MCU_36.H8 U5_Data_MCU_36.K2 U5_Data_MCU_36.M10 U6_Control_MCU_36.2 U6_Control_MCU_36.17 U6_Data_MCU_36.2 U6_Data_MCU_36.17 X2_Control_MCU_36.4
  other v1: 226.38,551.18 265.75,551.18 167.32,570.87 305.12,570.87 344.49,571.55 393.7,590.55 167.32,610.24 305.12,610.24 344.49,610.24 226.38,629.92
GPIO_1: J2.17 U5_Control_MCU_36.K4
GPIO_2: J2.18 U5_Control_MCU_36.M8
GPIO_3: J2.19 U5_Control_MCU_36.L10
GPIO_4: J2.20 U5_Control_MCU_36.L11
HI_CURRENT_1: J1.17 U5_Control_MCU_36.A3
HI_CURRENT_2: J1.18 U5_Control_MCU_36.A2
HI_CURRENT_3: J1.19 U5_Control_MCU_36.B11
HI_CURRENT_4: J1.20 U5_Control_MCU_36.A12
I2C_EXT_SCL: J2.9 U5_Control_MCU_36.C7
I2C_EXT_SDA: J2.10 U5_Control_MCU_36.B7
I2C_MCU_SCL: R14.2 U5_Control_MCU_36.G12 U5_Data_MCU_36.G12
I2C_MCU_SDA: R12.2 U5_Control_MCU_36.G11 U5_Data_MCU_36.G11
I2C_SENS_SCL: J1.7 R11.2 U2.19 U3.B1 U5_Data_MCU_36.C7
I2C_SENS_SDA: J1.8 R13.2 U2.20 U3.A2 U5_Data_MCU_36.B7
NetC3_2: C3.2 U2.9
NetC4_2: C4.2 U2.26 X1.2
NetC5_2: C5.2 U2.27 X1.1
NetC6_1: C6.1 FB1.2 R9.2
NetC8_1: C8.1 Q1.1 R10.2
NetC15_Control_MCU_36_1: C15_Control_MCU_36.1 FB2_Control_MCU_36.1 R18_Control_MCU_36.1 U5_Control_MCU_36.H5
NetC15_Data_MCU_36_1: C15_Data_MCU_36.1 FB2_Data_MCU_36.1 R18_Data_MCU_36.1 U5_Data_MCU_36.H5
NetC16_Control_MCU_36_1: C16_Control_MCU_36.1 R18_Control_MCU_36.2 U5_Control_MCU_36.G5
NetC16_Data_MCU_36_1: C16_Data_MCU_36.1 R18_Data_MCU_36.2 U5_Data_MCU_36.G5
NetC17_Control_MCU_36_2: C17_Control_MCU_36.2 U5_Control_MCU_36.M3
NetC17_Data_MCU_36_2: C17_Data_MCU_36.2 U5_Data_MCU_36.M3
NetD1_Control_MCU_36_1: D1_Control_MCU_36.1 F1_Control_MCU_36.2
NetD1_Data_MCU_36_1: D1_Data_MCU_36.1 F1_Data_MCU_36.2
NetD2_Control_LED_1: D2_Control_LED.1
NetD2_Control_LED_3: D2_Control_LED.3 R24_Control_LED.2
NetD2_Data_LED_1: D2_Data_LED.1
NetD2_Data_LED_3: D2_Data_LED.3 R24_Data_LED.2
NetF1_Control_MCU_36_1: F1_Control_MCU_36.1 J5_Control_MCU_36.2 J5_Control_MCU_36.11
NetF1_Data_MCU_36_1: F1_Data_MCU_36.1 J5_Data_MCU_36.2 J5_Data_MCU_36.11
NetFB1_1: FB1.1 J4.1 U3.A4
NetJ3_P9: J3.P9 R8.2
NetJ3_SH1: J3.SH1
NetJ3_SH2: J3.SH2
NetJ3_SH3: J3.SH3
NetJ3_SH4: J3.SH4
NetJ5_Control_MCU_36_3: J5_Control_MCU_36.3 R16_Control_MCU_36.1
NetJ5_Control_MCU_36_4: J5_Control_MCU_36.4
NetJ5_Control_MCU_36_5: J5_Control_MCU_36.5 J5_Control_MCU_36.8 R15_Control_MCU_36.2
NetJ5_Control_MCU_36_6: J5_Control_MCU_36.6 J5_Control_MCU_36.7 R17_Control_MCU_36.2
NetJ5_Control_MCU_36_9: J5_Control_MCU_36.9 R19_Control_MCU_36.1
NetJ5_Control_MCU_36_10: J5_Control_MCU_36.10
NetJ5_Control_MCU_36_S1: J5_Control_MCU_36.S1
NetJ5_Control_MCU_36_S2: J5_Control_MCU_36.S2
NetJ5_Control_MCU_36_S3: J5_Control_MCU_36.S3
NetJ5_Control_MCU_36_S4: J5_Control_MCU_36.S4
NetJ5_Control_MCU_36_S5: J5_Control_MCU_36.S5
NetJ5_Control_MCU_36_S6: J5_Control_MCU_36.S6
NetJ5_Data_MCU_36_3: J5_Data_MCU_36.3 R16_Data_MCU_36.1
NetJ5_Data_MCU_36_4: J5_Data_MCU_36.4
NetJ5_Data_MCU_36_5: J5_Data_MCU_36.5 J5_Data_MCU_36.8 R15_Data_MCU_36.2
NetJ5_Data_MCU_36_6: J5_Data_MCU_36.6 J5_Data_MCU_36.7 R17_Data_MCU_36.2
NetJ5_Data_MCU_36_9: J5_Data_MCU_36.9 R19_Data_MCU_36.1
NetJ5_Data_MCU_36_10: J5_Data_MCU_36.10
NetJ5_Data_MCU_36_S1: J5_Data_MCU_36.S1
NetJ5_Data_MCU_36_S2: J5_Data_MCU_36.S2
NetJ5_Data_MCU_36_S3: J5_Data_MCU_36.S3
NetJ5_Data_MCU_36_S4: J5_Data_MCU_36.S4
NetJ5_Data_MCU_36_S5: J5_Data_MCU_36.S5
NetJ5_Data_MCU_36_S6: J5_Data_MCU_36.S6
NetQ2_Control_LED_2: Q2_Control_LED.2 R22_Control_LED.2 U5_Control_MCU_36.E11
NetQ2_Control_LED_3: Q2_Control_LED.3 R23_Control_LED.2 R24_Control_LED.1
NetQ2_Data_LED_2: Q2_Data_LED.2 R22_Data_LED.2 U5_Data_MCU_36.E11
NetQ2_Data_LED_3: Q2_Data_LED.3 R23_Data_LED.2 R24_Data_LED.1
NetR5_1: R5.1 U2.17
NetR6_1: R6.1 U2.6
NetR7_2: R7.2 U2.5
NetR20_Control_MCU_36_2: R20_Control_MCU_36.2 U5_Control_MCU_36.G1 U5_Control_MCU_36.G2 U5_Control_MCU_36.J2
NetR20_Data_MCU_36_2: R20_Data_MCU_36.2 U5_Data_MCU_36.G1 U5_Data_MCU_36.G2 U5_Data_MCU_36.J2
NetR21_Control_MCU_36_2: R21_Control_MCU_36.2 U5_Control_MCU_36.L7
NetR21_Data_MCU_36_2: R21_Data_MCU_36.2 U5_Data_MCU_36.L7
NetTP1_1: TP1.1 U3.J5
NetTP2_1: TP2.1 U3.J4
NetTP3_1: TP3.1 U3.C4
NetTP4_Control_MCU_36_1: TP4_Control_MCU_36.1 U6_Control_MCU_36.10
NetTP4_Data_MCU_36_1: TP4_Data_MCU_36.1 U6_Data_MCU_36.10
NetU2_7: U2.7
NetU2_8: U2.8
NetU2_10: U2.10
NetU2_11: U2.11
NetU2_14: U2.14
NetU3_A6: U3.A6
NetU3_C1: U3.C1
NetU3_C3: U3.C3
NetU3_C5: U3.C5
NetU3_C6: U3.C6
NetU3_D1: U3.D1
NetU3_D3: U3.D3
NetU3_D4: U3.D4
NetU3_E1: U3.E1
NetU3_E3: U3.E3
NetU3_E9: U3.E9
NetU3_F1: U3.F1
NetU3_F3: U3.F3
NetU3_F4: U3.F4
NetU3_F6: U3.F6
NetU3_F9: U3.F9
NetU3_G4: U3.G4
NetU3_G5: U3.G5
NetU3_G9: U3.G9
NetU3_J6: U3.J6
NetU3_J7: U3.J7
NetU3_J8: U3.J8
NetU4_4: U4.4
NetU5_Control_MCU_36_A6: U5_Control_MCU_36.A6
NetU5_Control_MCU_36_A7: U5_Control_MCU_36.A7
NetU5_Control_MCU_36_A8: U5_Control_MCU_36.A8
NetU5_Control_MCU_36_A9: U5_Control_MCU_36.A9
NetU5_Control_MCU_36_A10: U5_Control_MCU_36.A10
NetU5_Control_MCU_36_B1: U5_Control_MCU_36.B1
NetU5_Control_MCU_36_B2: U5_Control_MCU_36.B2
NetU5_Control_MCU_36_B3: U5_Control_MCU_36.B3
NetU5_Control_MCU_36_B5: U5_Control_MCU_36.B5
NetU5_Control_MCU_36_B6: U5_Control_MCU_36.B6
NetU5_Control_MCU_36_B9: U5_Control_MCU_36.B9
NetU5_Control_MCU_36_B10: U5_Control_MCU_36.B10
NetU5_Control_MCU_36_C1: U5_Control_MCU_36.C1
NetU5_Control_MCU_36_C2: U5_Control_MCU_36.C2
NetU5_Control_MCU_36_C3: U5_Control_MCU_36.C3
NetU5_Control_MCU_36_C5: U5_Control_MCU_36.C5
NetU5_Control_MCU_36_C6: U5_Control_MCU_36.C6
NetU5_Control_MCU_36_C9: U5_Control_MCU_36.C9
NetU5_Control_MCU_36_C10: U5_Control_MCU_36.C10
NetU5_Control_MCU_36_C11: U5_Control_MCU_36.C11
NetU5_Control_MCU_36_C12: U5_Control_MCU_36.C12
NetU5_Control_MCU_36_D1: U5_Control_MCU_36.D1
NetU5_Control_MCU_36_D2: U5_Control_MCU_36.D2
NetU5_Control_MCU_36_D3: U5_Control_MCU_36.D3
NetU5_Control_MCU_36_D5: U5_Control_MCU_36.D5
NetU5_Control_MCU_36_D6: U5_Control_MCU_36.D6
NetU5_Control_MCU_36_D7: U5_Control_MCU_36.D7
NetU5_Control_MCU_36_D9: U5_Control_MCU_36.D9
NetU5_Control_MCU_36_D10: U5_Control_MCU_36.D10
NetU5_Control_MCU_36_D12: U5_Control_MCU_36.D12
NetU5_Control_MCU_36_E1: U5_Control_MCU_36.E1
NetU5_Control_MCU_36_E2: U5_Control_MCU_36.E2
NetU5_Control_MCU_36_E3: U5_Control_MCU_36.E3
NetU5_Control_MCU_36_E4: U5_Control_MCU_36.E4
NetU5_Control_MCU_36_E9: U5_Control_MCU_36.E9
NetU5_Control_MCU_36_E10: U5_Control_MCU_36.E10
NetU5_Control_MCU_36_E12: U5_Control_MCU_36.E12
NetU5_Control_MCU_36_F1: U5_Control_MCU_36.F1
NetU5_Control_MCU_36_F2: U5_Control_MCU_36.F2
NetU5_Control_MCU_36_F3: U5_Control_MCU_36.F3
NetU5_Control_MCU_36_F4: U5_Control_MCU_36.F4
NetU5_Control_MCU_36_F9: U5_Control_MCU_36.F9
NetU5_Control_MCU_36_F10: U5_Control_MCU_36.F10
NetU5_Control_MCU_36_F11: U5_Control_MCU_36.F11
NetU5_Control_MCU_36_F12: U5_Control_MCU_36.F12
NetU5_Control_MCU_36_G3: U5_Control_MCU_36.G3
NetU5_Control_MCU_36_G4: U5_Control_MCU_36.G4
NetU5_Control_MCU_36_G9: U5_Control_MCU_36.G9
NetU5_Control_MCU_36_G10: U5_Control_MCU_36.G10
NetU5_Control_MCU_36_H4: U5_Control_MCU_36.H4
NetU5_Control_MCU_36_H9: U5_Control_MCU_36.H9
NetU5_Control_MCU_36_H11: U5_Control_MCU_36.H11
NetU5_Control_MCU_36_H12: U5_Control_MCU_36.H12
NetU5_Control_MCU_36_J1: U5_Control_MCU_36.J1
NetU5_Control_MCU_36_J3: U5_Control_MCU_36.J3
NetU5_Control_MCU_36_J4: U5_Control_MCU_36.J4
NetU5_Control_MCU_36_J5: U5_Control_MCU_36.J5 U6_Control_MCU_36.8
NetU5_Control_MCU_36_J6: U5_Control_MCU_36.J6 U6_Control_MCU_36.6
NetU5_Control_MCU_36_J7: U5_Control_MCU_36.J7
NetU5_Control_MCU_36_J8: U5_Control_MCU_36.J8
NetU5_Control_MCU_36_J10: U5_Control_MCU_36.J10
NetU5_Control_MCU_36_J11: U5_Control_MCU_36.J11
NetU5_Control_MCU_36_J12: U5_Control_MCU_36.J12
NetU5_Control_MCU_36_K1: U5_Control_MCU_36.K1
NetU5_Control_MCU_36_K3: U5_Control_MCU_36.K3
NetU5_Control_MCU_36_K5: U5_Control_MCU_36.K5
NetU5_Control_MCU_36_K6: U5_Control_MCU_36.K6 U6_Control_MCU_36.9
NetU5_Control_MCU_36_K7: U5_Control_MCU_36.K7 U6_Control_MCU_36.7
NetU5_Control_MCU_36_K8: U5_Control_MCU_36.K8
NetU5_Control_MCU_36_K10: U5_Control_MCU_36.K10
NetU5_Control_MCU_36_K11: U5_Control_MCU_36.K11
NetU5_Control_MCU_36_K12: U5_Control_MCU_36.K12
NetU5_Control_MCU_36_L1: U5_Control_MCU_36.L1
NetU5_Control_MCU_36_L2: U5_Control_MCU_36.L2
NetU5_Control_MCU_36_L3: U5_Control_MCU_36.L3
NetU5_Control_MCU_36_L4: U5_Control_MCU_36.L4
NetU5_Control_MCU_36_L5: U5_Control_MCU_36.L5
NetU5_Control_MCU_36_L8: U5_Control_MCU_36.L8
NetU5_Control_MCU_36_L9: U5_Control_MCU_36.L9
NetU5_Control_MCU_36_M1: U5_Control_MCU_36.M1
NetU5_Control_MCU_36_M2: U5_Control_MCU_36.M2
NetU5_Control_MCU_36_M4: U5_Control_MCU_36.M4
NetU5_Control_MCU_36_M5: U5_Control_MCU_36.M5
NetU5_Control_MCU_36_M6: U5_Control_MCU_36.M6 X3_Control_MCU_36.1
NetU5_Control_MCU_36_M7: U5_Control_MCU_36.M7 X3_Control_MCU_36.2
NetU5_Control_MCU_36_M9: U5_Control_MCU_36.M9
NetU5_Control_MCU_36_M11: U5_Control_MCU_36.M11 X2_Control_MCU_36.1
NetU5_Control_MCU_36_M12: U5_Control_MCU_36.M12 X2_Control_MCU_36.3
NetU5_Data_MCU_36_A1: U5_Data_MCU_36.A1
NetU5_Data_MCU_36_A2: U5_Data_MCU_36.A2
NetU5_Data_MCU_36_A3: U5_Data_MCU_36.A3
NetU5_Data_MCU_36_A4: U5_Data_MCU_36.A4
NetU5_Data_MCU_36_A5: U5_Data_MCU_36.A5
NetU5_Data_MCU_36_A6: U5_Data_MCU_36.A6
NetU5_Data_MCU_36_A7: U5_Data_MCU_36.A7
NetU5_Data_MCU_36_A8: U5_Data_MCU_36.A8
NetU5_Data_MCU_36_A9: U5_Data_MCU_36.A9
NetU5_Data_MCU_36_A10: U5_Data_MCU_36.A10
NetU5_Data_MCU_36_A11: U5_Data_MCU_36.A11
NetU5_Data_MCU_36_A12: U5_Data_MCU_36.A12
NetU5_Data_MCU_36_B1: U5_Data_MCU_36.B1
NetU5_Data_MCU_36_B2: U5_Data_MCU_36.B2
NetU5_Data_MCU_36_B3: U5_Data_MCU_36.B3
NetU5_Data_MCU_36_B4: U5_Data_MCU_36.B4
NetU5_Data_MCU_36_B5: U5_Data_MCU_36.B5
NetU5_Data_MCU_36_B6: U5_Data_MCU_36.B6
NetU5_Data_MCU_36_B9: U5_Data_MCU_36.B9
NetU5_Data_MCU_36_B10: U5_Data_MCU_36.B10
NetU5_Data_MCU_36_B11: U5_Data_MCU_36.B11
NetU5_Data_MCU_36_B12: U5_Data_MCU_36.B12
NetU5_Data_MCU_36_C1: U5_Data_MCU_36.C1
NetU5_Data_MCU_36_C2: U5_Data_MCU_36.C2
NetU5_Data_MCU_36_C3: U5_Data_MCU_36.C3
NetU5_Data_MCU_36_C4: U5_Data_MCU_36.C4
NetU5_Data_MCU_36_C5: U5_Data_MCU_36.C5
NetU5_Data_MCU_36_C6: U5_Data_MCU_36.C6
NetU5_Data_MCU_36_C9: U5_Data_MCU_36.C9
NetU5_Data_MCU_36_C10: U5_Data_MCU_36.C10
NetU5_Data_MCU_36_C11: U5_Data_MCU_36.C11
NetU5_Data_MCU_36_C12: U5_Data_MCU_36.C12
NetU5_Data_MCU_36_D5: U5_Data_MCU_36.D5
NetU5_Data_MCU_36_D6: U5_Data_MCU_36.D6
NetU5_Data_MCU_36_D7: U5_Data_MCU_36.D7
NetU5_Data_MCU_36_D9: U5_Data_MCU_36.D9
NetU5_Data_MCU_36_D10: U5_Data_MCU_36.D10
NetU5_Data_MCU_36_D11: U5_Data_MCU_36.D11
NetU5_Data_MCU_36_D12: U5_Data_MCU_36.D12
NetU5_Data_MCU_36_E1: U5_Data_MCU_36.E1
NetU5_Data_MCU_36_E12: U5_Data_MCU_36.E12
NetU5_Data_MCU_36_F1: U5_Data_MCU_36.F1
NetU5_Data_MCU_36_F2: U5_Data_MCU_36.F2
NetU5_Data_MCU_36_F3: U5_Data_MCU_36.F3
NetU5_Data_MCU_36_F4: U5_Data_MCU_36.F4
NetU5_Data_MCU_36_F9: U5_Data_MCU_36.F9
NetU5_Data_MCU_36_F10: U5_Data_MCU_36.F10
NetU5_Data_MCU_36_F11: U5_Data_MCU_36.F11
NetU5_Data_MCU_36_F12: U5_Data_MCU_36.F12
NetU5_Data_MCU_36_G3: U5_Data_MCU_36.G3
NetU5_Data_MCU_36_G4: U5_Data_MCU_36.G4
NetU5_Data_MCU_36_G9: U5_Data_MCU_36.G9
NetU5_Data_MCU_36_G10: U5_Data_MCU_36.G10
NetU5_Data_MCU_36_H4: U5_Data_MCU_36.H4
NetU5_Data_MCU_36_H9: U5_Data_MCU_36.H9
NetU5_Data_MCU_36_H10: U5_Data_MCU_36.H10
NetU5_Data_MCU_36_H11: U5_Data_MCU_36.H11
NetU5_Data_MCU_36_H12: U5_Data_MCU_36.H12
NetU5_Data_MCU_36_J1: U5_Data_MCU_36.J1
NetU5_Data_MCU_36_J3: U5_Data_MCU_36.J3
NetU5_Data_MCU_36_J4: U5_Data_MCU_36.J4
NetU5_Data_MCU_36_J5: U5_Data_MCU_36.J5 U6_Data_MCU_36.8
NetU5_Data_MCU_36_J6: U5_Data_MCU_36.J6 U6_Data_MCU_36.6
NetU5_Data_MCU_36_J7: U5_Data_MCU_36.J7
NetU5_Data_MCU_36_J8: U5_Data_MCU_36.J8
NetU5_Data_MCU_36_J9: U5_Data_MCU_36.J9
NetU5_Data_MCU_36_J10: U5_Data_MCU_36.J10
NetU5_Data_MCU_36_J11: U5_Data_MCU_36.J11
NetU5_Data_MCU_36_J12: U5_Data_MCU_36.J12
NetU5_Data_MCU_36_K1: U5_Data_MCU_36.K1
NetU5_Data_MCU_36_K3: U5_Data_MCU_36.K3
NetU5_Data_MCU_36_K4: U5_Data_MCU_36.K4
NetU5_Data_MCU_36_K5: U5_Data_MCU_36.K5
NetU5_Data_MCU_36_K6: U5_Data_MCU_36.K6 U6_Data_MCU_36.9
NetU5_Data_MCU_36_K7: U5_Data_MCU_36.K7 U6_Data_MCU_36.7
NetU5_Data_MCU_36_K8: U5_Data_MCU_36.K8
NetU5_Data_MCU_36_K9: U5_Data_MCU_36.K9
NetU5_Data_MCU_36_K10: U5_Data_MCU_36.K10
NetU5_Data_MCU_36_K11: U5_Data_MCU_36.K11
NetU5_Data_MCU_36_K12: U5_Data_MCU_36.K12
NetU5_Data_MCU_36_L1: U5_Data_MCU_36.L1
NetU5_Data_MCU_36_L2: U5_Data_MCU_36.L2
NetU5_Data_MCU_36_L5: U5_Data_MCU_36.L5
NetU5_Data_MCU_36_L8: U5_Data_MCU_36.L8
NetU5_Data_MCU_36_L9: U5_Data_MCU_36.L9
NetU5_Data_MCU_36_L10: U5_Data_MCU_36.L10
NetU5_Data_MCU_36_L11: U5_Data_MCU_36.L11
NetU5_Data_MCU_36_M1: U5_Data_MCU_36.M1
NetU5_Data_MCU_36_M2: U5_Data_MCU_36.M2
NetU5_Data_MCU_36_M4: U5_Data_MCU_36.M4
NetU5_Data_MCU_36_M5: U5_Data_MCU_36.M5
NetU5_Data_MCU_36_M6: U5_Data_MCU_36.M6 X3_Data_MCU_36.1
NetU5_Data_MCU_36_M7: U5_Data_MCU_36.M7 X3_Data_MCU_36.2
NetU5_Data_MCU_36_M8: U5_Data_MCU_36.M8
NetU5_Data_MCU_36_M9: U5_Data_MCU_36.M9
NetU5_Data_MCU_36_M11: U5_Data_MCU_36.M11 X2_Data_MCU_36.1
NetU5_Data_MCU_36_M12: U5_Data_MCU_36.M12 X2_Data_MCU_36.3
NetU6_Control_MCU_36_3: U6_Control_MCU_36.3
NetU6_Control_MCU_36_5: U6_Control_MCU_36.5
NetU6_Control_MCU_36_11: U6_Control_MCU_36.11
NetU6_Control_MCU_36_12: U6_Control_MCU_36.12
NetU6_Control_MCU_36_14: U6_Control_MCU_36.14
NetU6_Control_MCU_36_15: U6_Control_MCU_36.15
NetU6_Control_MCU_36_16: U6_Control_MCU_36.16
NetU6_Data_MCU_36_3: U6_Data_MCU_36.3
NetU6_Data_MCU_36_5: U6_Data_MCU_36.5
NetU6_Data_MCU_36_11: U6_Data_MCU_36.11
NetU6_Data_MCU_36_12: U6_Data_MCU_36.12
NetU6_Data_MCU_36_14: U6_Data_MCU_36.14
NetU6_Data_MCU_36_15: U6_Data_MCU_36.15
NetU6_Data_MCU_36_16: U6_Data_MCU_36.16
PWM_1: J2.8 U5_Control_MCU_36.A5
PWM_2: J2.7 U5_Control_MCU_36.K9
PWM_3: J2.6 U5_Control_MCU_36.J9
PWM_4: J2.5 U5_Control_MCU_36.A1
PWM_5: J2.4 U5_Control_MCU_36.A4
PWM_6: J2.3 U5_Control_MCU_36.C4
PWM_7: J2.2 U5_Control_MCU_36.B4
PWM_8: J2.1 U5_Control_MCU_36.A11
RC_RECEIVER: J1.6 U5_Control_MCU_36.D11
Reset_Control_MCU_36: U5_Control_MCU_36.L12 U6_Control_MCU_36.4 U6_Control_MCU_36.13
Reset_Data_MCU_36: U5_Data_MCU_36.L12 U6_Data_MCU_36.4 U6_Data_MCU_36.13
SD_CLK: J3.P5 U5_Data_MCU_36.D1
SD_CMD: J3.P3 U5_Data_MCU_36.E4
SD_DAT0: J3.P7 U5_Data_MCU_36.D2
SD_DAT1: J3.P8 U5_Data_MCU_36.D3
SD_DAT2: J3.P1 U5_Data_MCU_36.E2
SD_DAT3: J3.P2 U5_Data_MCU_36.E3
SPI_EXT_CS1: J2.11 U5_Control_MCU_36.D4
SPI_EXT_CS2: J2.12 U5_Control_MCU_36.B12
SPI_EXT_CS3: J2.13 U5_Control_MCU_36.H10
SPI_EXT_MISO: J2.15 U5_Control_MCU_36.B8
SPI_EXT_MOSI: J2.14 U5_Control_MCU_36.C8
SPI_EXT_SCK: J2.16 U5_Control_MCU_36.D8
SPI_SENS_CS: R1.1 U5_Data_MCU_36.D4
SPI_SENS_CS_1: U1.1
SPI_SENS_MISO: U1.2 U5_Data_MCU_36.B8
SPI_SENS_MOSI: U1.5 U5_Data_MCU_36.C8
SPI_SENS_SCK: U1.6 U5_Data_MCU_36.D8
UART_SENS_RX: J1.9 U5_Data_MCU_36.E10
UART_SENS_TX: J1.10 U5_Data_MCU_36.E9
VREFL_Control_MCU_36: C15_Control_MCU_36.2 C16_Control_MCU_36.2 C17_Control_MCU_36.1 FB3_Control_MCU_36.2 U5_Control_MCU_36.G6 U5_Control_MCU_36.H6
VREFL_Data_MCU_36: C15_Data_MCU_36.2 C16_Data_MCU_36.2 C17_Data_MCU_36.1 FB3_Data_MCU_36.2 U5_Data_MCU_36.G6 U5_Data_MCU_36.H6
pads on no net: J1.21 J2.21 J3.10 J3.11 J4.3 J5_Control_MCU_36. J5_Data_MCU_36. U2.1 U2.12 U2.13 U2.15 U2.16 U2.21 U2.22 U2.23 U2.24 X2_Control_MCU_36.2 X2_Data_MCU_36.2 X2_Data_MCU_36.4

## Polygon pours and split planes (outlines as drawn)
+3.3V on L3 "NONET_L03_P000" (solid, shelved, pour order 0): 0,0 0,2362.2 1968.5,2362.2 1968.5,0
GND on L2 (split plane): 2342.11,20.1 20.1,20.1 20.1,3523.21 2342.11,3523.21

## Silkscreen, mask and mechanical layers (free items; w line width, h text height)
Top Overlay:
  text "+5V" at 3134.92,753.03 h30
  text "+3.3V" at 3134.92,693.98 h30
  text "GND" at 3134.92,634.92 h30
Mechanical 2:
  the board outline again, w10
  text "<- Board Outline" at 2401.66,40.29 h120
Sketch:
  lines w10: -236.22,5669.29 -157.48,5669.29 ; -78.74,5669.29 -157.48,5669.29 ; -78.74,9212.6 -236.22,9212.6 -157.48,9212.6 -157.48,5669.29 ; 0,5433.07 0,5590.55 ; 0,5511.81 2362.2,5511.81 ; 2362.2,5433.07 2362.2,5590.55 ; 0,7066.93 669.29,7066.93 669.29,7814.96 0,7814.96 0,7066.93 ; 78.74,6102.36 551.18,6102.36 551.18,6417.32 78.74,6417.32 78.74,6102.36 ; 78.74,6614.17 551.18,6614.17 551.18,6968.5 78.74,6968.5 78.74,6614.17 ; 629.92,9566.93 1712.6,9566.93 1712.6,9881.89 629.92,9881.89 629.92,9566.93 ; 807.09,5885.83 1555.12,5885.83 1555.12,6633.86 807.09,6633.86 807.09,5885.83 ; 807.09,8326.77 1555.12,8326.77 1555.12,9074.8 807.09,9074.8 807.09,8326.77 ; 846.46,6732.28 1515.75,6732.28 1515.75,7204.72 846.46,7204.72 846.46,6732.28 ; 846.46,7755.91 1515.75,7755.91 1515.75,8228.35 846.46,8228.35 846.46,7755.91 ; 964.57,7283.46 1397.64,7283.46 1397.64,7677.17 964.57,7677.17 964.57,7283.46 ; 1614.17,7007.87 2007.87,7007.87 2007.87,7874.02 1614.17,7874.02 1614.17,7007.87 ; 1771.65,6614.17 2165.35,6614.17 2165.35,6850.39 1771.65,6850.39 1771.65,6614.17 ; 1811.02,8031.5 2204.72,8031.5 2204.72,8267.72 1811.02,8267.72 1811.02,8031.5 ; 2047.24,7007.87 2362.2,7007.87 2362.2,7874.02 2047.24,7874.02 2047.24,7007.87
  text "SERVO" at 919.32,9685.04 h157.48
  text "Control MCU" at 943,8602.36 h157.48
  text "RGB 1" at 1560.13,8110.24 h157.48
  text "B2B Conn" at 1064.38,7913.39 h157.48
  text "USB Conditioning" at 1692.91,7770.32 h157.48 r270
  text "SD Card" at 275.59,7755.91 h157.48 r270
  text "90mm" at -275.59,7639.38 h157.48 r270
  text "USB" at 2165.35,7568.54 h157.48 r270
  text "IMU" at 1020.49,7440.94 h157.48
  text "B2B Conn" at 1019.97,6889.76 h157.48
  text "FLASH" at 161.94,6732.28 h157.48
  text "RGB 2" at 1819.36,6692.91 h157.48
  text "GNSS" at 157.48,6220.47 h157.48
  text "Data MCU" at 1080.61,6161.42 h157.48
  text "60mm" at 1019.94,5393.7 h157.48

## Text inside footprints (layer, text, board x,y; h text height)
J5_Control_MCU_36: Mechanical 13 "PCB EDGE" at 2352.36,2224.41 h24 r90
J5_Data_MCU_36: Mechanical 13 "PCB EDGE" at 2352.36,1751.97 h24 r90
U1: Mechanical 13 "*" at 418.46,1069.05 h50 r180
U2: Mechanical 13 "*" at 1282.19,1746.65 h50 r180
U4: Mechanical 13 "*" at 1600.89,1393.27 h50 r270